# Altium PCB Plate.PcbDoc
Units mm, origin at the board's own origin, x right, y up, seen from the top; angles counter-clockwise.
Board outline 85 x 39.5 mm, 2 copper layers (Top Layer, Bottom Layer), stack 1.569 mm thick; 17 components, 18 nets, 82 pads, 21 vias.
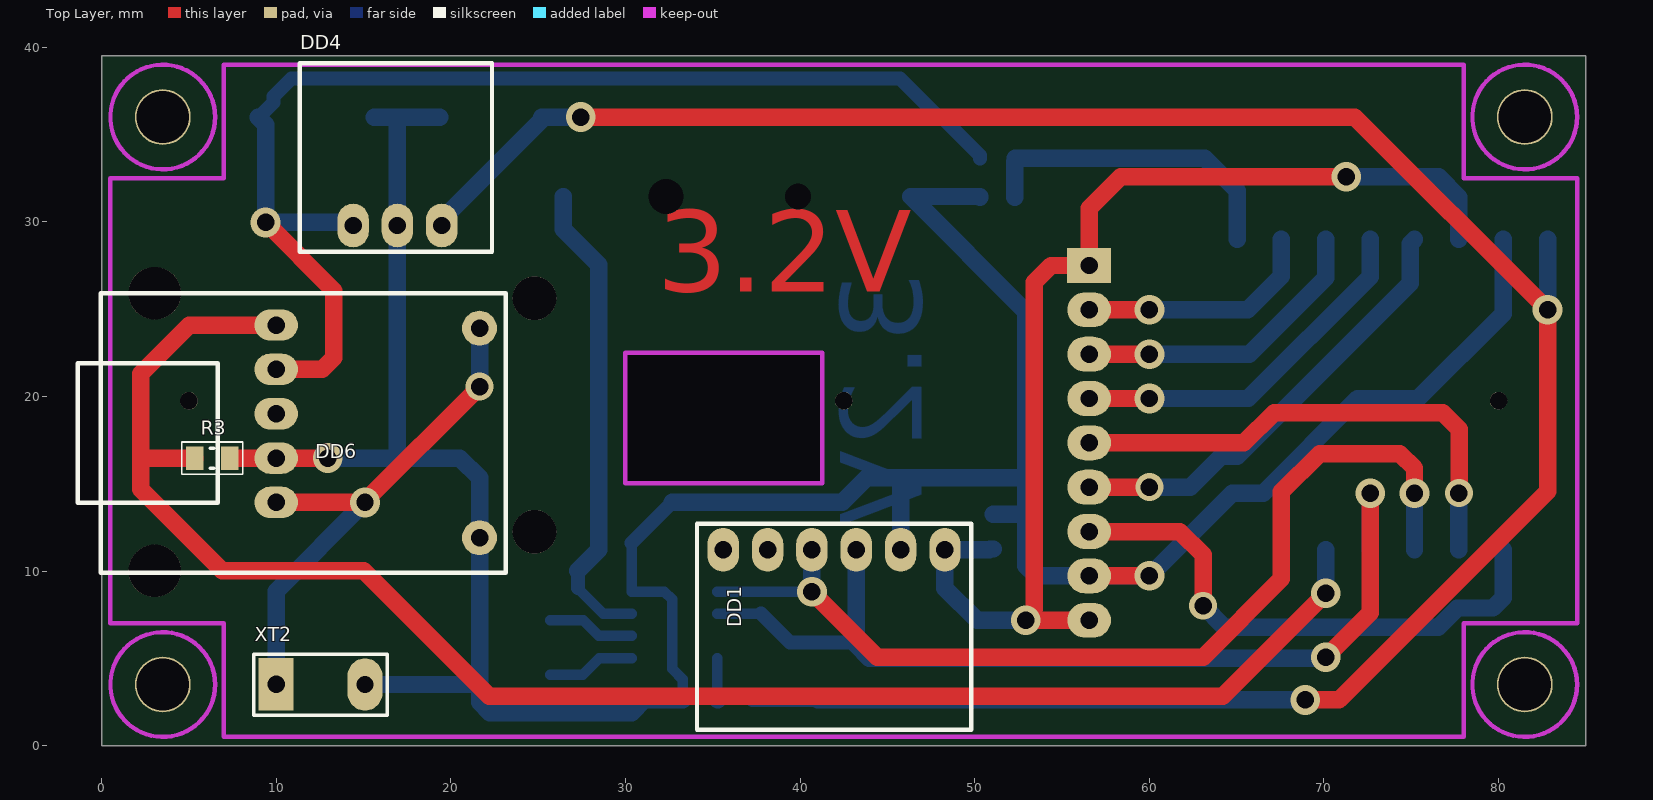
[diagram p0: Top Layer view]
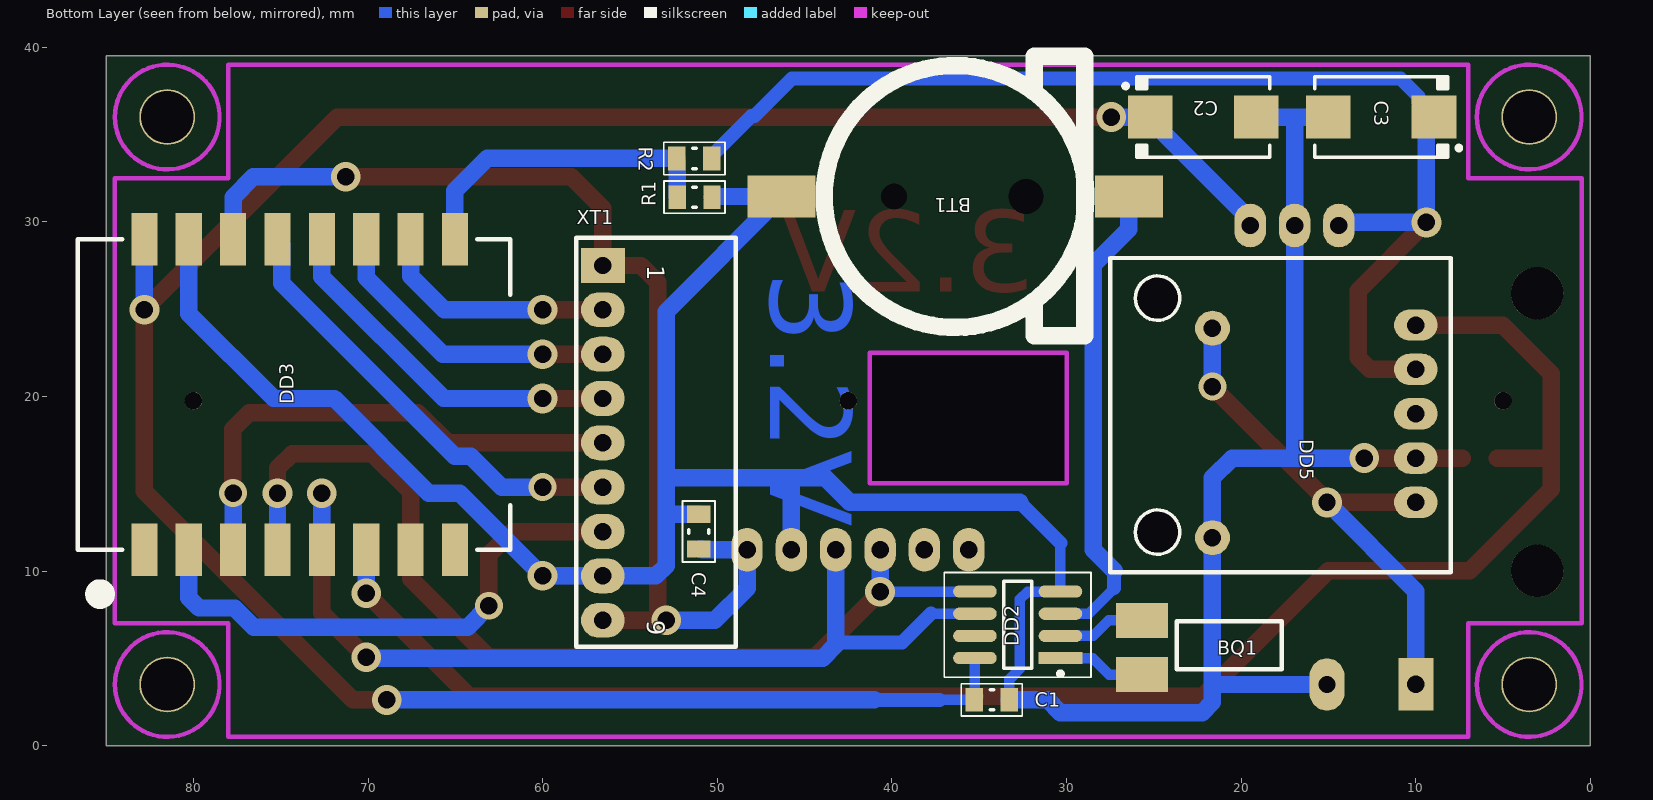
[diagram p1: Bottom Layer view, seen from below]

## Layer stack, top to bottom
Top Solder: solder mask 0.01, Solder Resist, Dk 3.5
Top Layer: signal copper 0.035
Dielectric 1: core 1.4986, Core-043, Dk 4.3
Bottom Layer: signal copper 0.035
Bottom Solder: solder mask 0.01, Solder Resist, Dk 3.5

## Board outline
0,0 0,39.5 85,39.5 85,0
cut-out: 29.995,22.503 41.261,22.503 41.261,15.025 29.995,15.025

## Design rules (kind name [scope] priority, off if disabled: settings)
Clearance [All] p1: gap=0.254 ignorepadtopadclearanceinfootprint=FALSE except(0: Arc-Hole Track-Hole SMDPad-Hole THPad-Hole Via-Hole Fill-Hole Poly-Hole Region-Hole Text-Hole)
PolygonConnect [All] p1: connectstyle=Relief reliefconductorwidth=0.254 reliefentries=4 polygonreliefangle="90 Angle" airgapwidth=0.254
RoutingVias [All] p1: holewidth=0.6 width=1.6 viastyle="Through Hole" minholewidth=0.4 minwidth=0.8 maxholewidth=1 maxwidth=2
SolderMaskExpansion [All] p1: expansion=0.102 istentingtop=FALSE
Width [All] p1: maxlimit=1 minlimit=0.4 preferedwidth=0.6 minimp=50.000000 maximp=50.000000 favimp=50.000000
30 further rules are at their usual default settings.

## Classes and differential pairs
component class Shema: BQ1 BT1 C1 C2 C3 C4 DD2 DD3 DD4 DD5 DD6 R1 R2 R3 XT1 XT2

## Components (designator, comment, footprint, x,y, rotation, side; value= is the part's Value field where it differs from the comment)
BQ1 "32.768k" XTAL_2x6_SMD 25.678,5.619 r180 bottom
BT1 "CR1220" CR1220 36.38,31.45 r180 bottom locked value=3V
C1 "Capacitor" Cap_0805 34.279,2.626 r0 bottom value=100нФ
C2 "Capacitor_Polar" "Tantal 2917_7343" 22.167,36 r180 bottom locked value="47мкФ 25В"
C3 "Capacitor_Polar" "Tantal 2917_7343" 11.978,36 r0 bottom locked value="47мкФ 25В"
C4 "Capacitor" Cap_0805 51.061,12.261 r270 bottom value=100нФ
DD1 "Обозначение при заказе" BME280_6Pin_1 48.296,11.213 r180 top locked
DD2 "DS1307" 8S1_M 29.621,5.014 r0 bottom
DD3 "ESP32-c3-supermini" "ESP32-C3 supermini_SMD" 72.646,20.109 r90 bottom locked value=ESP32-C3-supermini
DD4 "DC-DC_0.9-5V" DC-DC_0.9-5V 14.399,29.788 r0 top locked
DD5 "TPL5110 Module" "TPL5110 Module" 9.989,13.928 r90 bottom locked
DD6 "LiFePO4_Charger" LiFePO4_Charger 21.639,11.907 r90 top locked
R1 "Resistor" Res_0805 51.302,31.414 r180 bottom value=5,1к
R2 "Resistor" Res_0805 51.31,33.626 r0 bottom value=12к
R3 "Resistor" Res_0805 6.332,16.468 r180 top value=10K
XT1 "Header 1X9" PLS-9R-U1 56.551,27.501 r270 bottom locked
XT2 "Header 1x2" PIN_1X2_5.08_DIP 10,3.5 r0 top value=АКБ

## Footprints (in the part's own frame and the unit in brackets; to place one, negate y for a bottom-side part, rotate by r counter-clockwise, add the part's x,y. Pads: shape width x height; smd on the part's side, far side on the other; paste and mask are expansions set on the pad)
8S1_M [mm] "SOIC, 8-Leads, Body 4.9x3.9mm, Pitch 1.27mm, IPC Low Density"
  rect 2.5x0.7 smd: 1(0.725,0)
  oval 2.5x0.7 smd: 2(0.725,-1.27) 3(0.725,-2.54) 4(0.725,-3.81) 5(5.625,-3.81) 6(5.625,-2.54) 7(5.625,-1.27) 8(5.625,0)
  silkscreen extent -1.02,-4.9 7.37,1.09, body extent 0.17,-4.36 6.17,0.54, height 1.63
BME280_6Pin_1 [mm]
  oval 1.8x2.5 hole 1: 1(0,0) 2(2.54,0) 3(5.08,0) 4(7.62,0) 5(10.16,0) 6(12.7,0)
  silkscreen extent -1.5,-1.5 14.2,10.3, body extent -1.32,-1.34 14.02,10.16, height 8.6
Cap_0805 [mm] "Chip Resistor, 2-Leads, Body 2,0x1,3mm, IPC Medium Density"
  rect 1x1.35 smd: 1(-1,0) 2(1,0)
  silkscreen extent -1.75,-0.92 1.75,0.92, body extent -0.98,-0.61 1.02,0.59, height 1.2
CR1220 [mm]
  round 1 hole 1.5 unplated: 0(-3.5,0)
  round 1.3 hole 2 unplated: 0(4.064,0)
  rect 3.9x2.4 smd: 1(9.95,0) 2(-9.95,0)
  silkscreen extent -7.5,-7.98 7.5,8.02, body extent -8.74,-7.49 9.76,7.5, height 3.94
DC-DC_0.9-5V [mm]
  oval 1.8x2.5 hole 1: 1(0,0) 2(2.54,0) 3(5.08,0)
  silkscreen extent -3.05,-1.5 7.95,9.3, body extent -2.9,-1.5 7.85,9.25, height 8.6
"ESP32-C3 supermini_SMD" [mm]
  rect 3x1.5 smd: 1(-8.89,10.16) 2(-8.89,7.62) 3(-8.89,5.08) 4(-8.89,2.54) 5(-8.89,0) 6(-8.89,-2.54) 7(-8.89,-5.08) 8(-8.89,-7.62) 9(8.89,-7.62) 10(8.89,-5.08) 11(8.89,-2.54) 12(8.89,0) 13(8.89,2.54) 14(8.89,5.08) 15(8.89,7.62) 16(8.89,10.16)
  silkscreen extent -11.83,-10.8 8.89,13.97, body extent -8.89,-10.98 8.91,13.02, height 4.2
LiFePO4_Charger [mm]
  round 2 hole 1: 1(0,0) 2(12,0)
  round 3 hole 3: 6(-1.9,18.6) 6(14,18.6)
  silkscreen extent -2,-1.5 14,23, body extent -2,-1.5 14,22.9, height 8.6
PIN_1X2_5.08_DIP [mm]
  rect 2x3 hole 1: 1(-0.011,0.007)
  oval 2x3 hole 1: 2(5.08,0)
  silkscreen extent -1.28,-1.75 6.35,1.75
PLS-9R-U1 [mm]
  rect 2x2.5 hole 1 mask+0.102: 1(0.003,0.004)
  oval 2x2.5 hole 1 mask+0.102: 2(2.54,0) 3(5.08,0) 4(7.62,0) 5(10.16,0) 6(12.7,0) 7(15.24,0) 8(17.78,0) 9(20.32,0)
  silkscreen extent -1.59,-1.52 21.84,7.62, body extent -1.27,-1.27 21.59,7.25, height 6.39
Res_0805 [mm] "Chip Resistor, 2-Leads, Body 2,0x1,3mm, IPC Medium Density"
  rect 1x1.35 smd: 1(-1,0) 2(1,0)
  silkscreen extent -1.75,-0.92 1.75,0.92, body extent -1.15,-0.67 1.15,0.68, height 0.76
"Tantal 2917_7343" [mm] "Molded Capacitor, 2-Leads, Body 7.30x4.30mm, IPC Medium Density"
  rect 2.55x2.45 smd: 1(-3.025,0) 2(3.025,0)
  silkscreen extent -4.58,-2.3 3.8,2.3, body extent -3.65,-2.15 3.65,2.15, height 4.1
"TPL5110 Module" [mm]
  oval 1.8x2.5 hole 1: 1(0,0) 2(2.54,0) 3(5.08,0) 4(7.62,0) 5(10.16,0)
  silkscreen extent -4,-2 14,17.5, body extent -4,-2 14,17, height 8.6
XTAL_2x6_SMD [mm]
  rect 3x2 smd: 1(0,1.55) 2(0,-1.55)
  silkscreen extent 2,-1.25 8,1.5, body extent -1,-1.25 8,1.54, height 1.79

## Part data
BQ1: library part XTAL-0003, "Кварцевый резонатор 32768 Гц (часовой)", Manufacturer=Китай, Package=DIP, Box=A_2, ID=XTAL-0003, Note="Общий запас с XTAL-0001", Status=active, Stock=0
BT1: library part MEC-0001, "Держатель батарейки CR1220", Manufacturer=Китай, ID=MEC-0001, Name="держатель для CR2032", Status=active, Stock=0
C1 C4: "Конденсатор", Package=0805
C2 C3: "Конденсатор эл-лит", Package=DIP
DD1: library part BME280_6Pin, "Описание свойств компонента", Name=BME280
DD2: "Serial Clock", Package=8S1, Name=DS1307
DD3: "esp32-c3-supermini"
DD4 DD5 DD6: "DC-DC Converter", Package=DIP
  DD4: Name=DC-DC
  DD5: Name="TPL5110 Block"
  DD6: Name=LiFePO4_Charger
R1 R2 R3: "Резистор", Package=0805
XT1: Package=PLD2x8, Name="Штыри на плату"
XT2: "Header 1x3", Name=Jamper

## Free pads (board coordinates)
  round 1 hole 1: 47(5,19.75) 47(42.5,19.75) 47(80,19.75)
  round 2.5 hole 2.5: 47(24.787,12.246) 47(24.787,25.622)
  round 3.2 hole 3 unplated: MTH1(3.5,3.5) MTH2(3.5,36) MTH3(81.5,36) MTH4(81.5,3.5)

## Via types
v1: diameter 1.7, hole 1, Top Layer to Bottom Layer, 17 vias
v2: diameter 1.6, hole 1, Top Layer to Bottom Layer, 4 vias

## Nets (pads, with @x,y where several pads share a name; then routed paths per layer and width w, separated by ;. In a path a pad name is that pad's centre, name@x,y a point inside that pad or via, vN(x,y) a via of type N, cw(c..) or ccw(c..) an arc to the next point about the centre after c; other vN are vias at no path point)
+3.3V: C4.2 DD1.1 DD3.14 XT1.1 XT1.9 | length 65.2
  Top Layer w1: XT1.9 v1(52.927,7.181) 52.927,7.37 53.407,7.849 53.407,26.529 54.375,27.498 XT1.1 56.547,30.764 58.359,32.576 v1(71.268,32.576)
  Bottom Layer w1: C4.2 50.886,11.261 50.838,11.213 DD1.1 48.296,9.017 50.133,7.181 v1(52.927,7.181) ; v1(71.268,32.576) 76.564,32.576 77.726,31.414 DD3.14
+5V: C1.2 C2.1 DD2.8 DD3.16 DD4.3 | length 140.2
  Top Layer w1: v1(27.433,36) 71.767,36 v1(82.806,24.961) 82.806,14.569 70.863,2.626 v1@68.912,2.626
  Bottom Layer w0.6: C1.2@35.246,2.834 DD2.8 ; C1.2 37.267,2.626
  Bottom Layer w0.8: 37.267,2.626 40.999,2.626
  Bottom Layer w1: DD4.3 19.479,30.121 C2.1@25.358,36 ; C2.1 C2.1@25.358,36 ; C2.1@25.408,36 C2.1@25.358,36 ; v1(27.433,36) C2.1@25.358,36 ; C1.2@35.246,2.834 35.279,2.801 C1.2 ; 40.999,2.626 68.912,2.626 v1(68.922,2.616) ; v1(82.806,24.961) DD3.16
ADC_BT: DD3.9 R1.1 R2.2 | length 18.5
  Bottom Layer w1: R1.1 52.302,33.444 52.31,33.451 R2.2 63.171,33.626 65.026,31.772 DD3.9
EPD_BUSY: DD3.10 XT1.2 | length 13.9
  Top Layer w1: XT1.2 v1(60.007,24.961)
  Bottom Layer w1: v1(60.007,24.961) 65.64,24.961 67.566,26.886 DD3.10
EPD_CS: DD3.3 XT1.5 | length 29.2
  Top Layer w1: XT1.5 65.416,17.341 67.147,19.072 76.808,19.072 77.758,18.122 77.758,14.49 v2(77.726,14.458)
  Bottom Layer w1: DD3.3 v2(77.726,14.458)
EPD_DC: DD3.12 XT1.4 | length 21.1
  Top Layer w1: XT1.4 v1(60.007,19.881)
  Bottom Layer w1: v1(60.007,19.881) 65.663,19.881 72.646,26.863 DD3.12
EPD_MOSI: DD3.2 XT1.7 | length 31.1
  Top Layer w1: XT1.7 61.742,12.261 63.077,10.925 v2(63.077,8.013)
  Bottom Layer w1: v2(63.077,8.013) 64.298,6.792 76.546,6.792 77.635,7.881 79.68,7.881 80.266,8.467 DD3.2
EPD_RST: DD3.11 XT1.3 | length 17.6
  Top Layer w1: XT1.3 v1(60.007,22.421)
  Bottom Layer w1: v1(60.007,22.421) 65.722,22.421 70.106,26.805 DD3.11
EPD_SCK: DD3.13 XT1.6 | length 25.8
  Top Layer w1: XT1.6 v2(60.007,14.801)
  Bottom Layer w1: v2(60.007,14.801) 62.332,14.801 64.114,16.582 65.026,16.582 74.936,26.492 74.936,28.749 DD3.13
GND: BT1.2 C1.1 C2.2 C3.2 C4.1 DD1.2 DD2.4 DD3.15 DD4.2 DD5.2 DD6.1 R1.2 R3.1 XT1.8 XT2.2 | length 180.6
  Top Layer w1: R3.1 DD5.2 v1(12.939,16.468) ; XT1.8 v1(60.007,9.721)
  Bottom Layer w0.6: 30.346,11.603 DD2.4 32.23,8.824 32.67,8.384 32.67,4.396 33.279,3.788 C1.1
  Bottom Layer w0.8: 30.346,11.603 32.67,13.928
  Bottom Layer w1: v1(12.939,16.468) 16.977,16.468 ; XT2.2 21.639,3.5 ; C3.2@15.609,36 16.939,36 ; DD4.2@16.977,29.75 DD4.2 ; C2.2@19.358,36 C2.2 16.939,36 ; 32.67,13.928 42.412,13.928 43.814,15.33 45.756,15.33 ; C1.1 31.077,2.626 30.346,1.895 22.225,1.895 21.639,2.481 21.639,3.5 ; DD1.2 45.756,15.33 ; R1.2 50.302,31.45 BT1.2 52.927,24.852 52.927,15.33 ; C4.1 52.846,13.261 52.927,13.18 ; v1@60.007,9.705 64.76,14.458 66.511,14.458 71.934,19.881 75.411,19.881 80.266,24.735 DD3.15 ; v1(60.007,9.721) XT1.8 53.513,9.721 52.927,10.307 52.927,13.18 ; DD4.2 16.939,16.506 16.977,16.468 ; DD4.2 16.939,36 ; 16.977,16.468 20.502,16.468 21.639,15.33 DD6.1 21.639,3.5 ; 45.756,15.33 52.927,15.33 ; 52.927,13.18 52.927,15.33
I2C_SCL: DD1.3 DD2.6 DD3.5 | length 54.9
  Top Layer w1: v1(70.106,5.06) 72.646,7.6 v1(72.646,14.458)
  Bottom Layer w0.6: DD2.6 37.762,7.554
  Bottom Layer w0.8: 37.762,7.554 39.408,5.909 43.216,5.909
  Bottom Layer w1: 43.216,7.181 43.216,5.909 43.216,5.767 43.969,5.014 70.06,5.014 v1(70.106,5.06) ; 43.216,7.333 DD1.3 ; DD3.5 v1(72.646,14.458)
I2C_SDA: DD1.4 DD2.5 DD3.4 | length 56.7
  Top Layer w1: v1(40.676,8.813) 44.429,5.06 63.077,5.06 67.566,9.548 67.566,14.533 69.746,16.713 74.352,16.713 75.186,15.88 v1(75.186,14.458)
  Bottom Layer w0.6: DD2.5 35.251,8.819 40.67,8.819 v1(40.676,8.813)
  Bottom Layer w1: v1(40.676,8.813) DD1.4 ; DD3.4 v1(75.186,14.458)
NetBQ1_1: BQ1.1 DD2.2 | length 5
  Bottom Layer w0.6: BQ1.1 25.69,7.181 27.581,7.181 28.477,6.284 DD2.2
NetBQ1_2: BQ1.2 DD2.1 | length 5.1
  Bottom Layer w0.6: BQ1.2 27.557,4.069 28.502,5.014 DD2.1
NetBT1_1: BT1.1 DD2.3 | length 27.5
  Bottom Layer w0.6: 27.271,9.017 28.734,7.554 DD2.3
  Bottom Layer w0.8: 27.271,9.017 27.271,10.007
  Bottom Layer w1: BT1.1 26.43,29.585 28.477,27.538 28.477,11.213 27.271,10.007
NetC3_1: C3.1 DD4.1 DD5.4 R2.1 | length 68.7
  Top Layer w1: v1(9.384,29.963) 13.296,26.05 13.296,22.203 12.641,21.548 DD5.4
  Bottom Layer w0.8: C3.1 9.003,36 9.828,36.825 9.828,37.175 10.872,38.219 45.717,38.219 47.876,36.06 48.051,36.06 50.31,33.801 R2.1
  Bottom Layer w1: C3.1 9.384,35.569 v1(9.384,29.963) 14.224,29.963 DD4.1
NetDD5_1: DD5.1 DD6.2 XT2.1 | length 30.3
  Top Layer w1: DD5.1 15.007,13.928 v2(21.639,20.56)
  Bottom Layer w1: XT2.1 9.989,8.837 v1(15.08,13.928) ; v2(21.639,20.56) DD6.2
PWR_OFF: DD3.6 DD5.5 R3.2 | length 96.4
  Top Layer w1: R3.2 2.225,16.468 ; DD5.5 5.003,24.088 2.225,21.31 2.225,16.468 ; v1(70.106,8.736) 64.199,2.829 22.2,2.829 15.022,10.007 6.911,10.007 2.225,14.692 2.225,16.468
  Bottom Layer w1: v1(70.106,8.736) DD3.6
pads on no net: BT1.0 DD1.5 DD1.6 DD2.7 DD3.1 DD3.7 DD3.8 DD5.3 DD6.6

## Keep-outs
Keep-Out Layer:
  circle w0.25: c3.5,36 r3
  circle w0.25: c81.5,36 r3
  circle w0.25: c81.5,3.5 r3
  circle w0.25: c3.5,3.5 r3
  lines w0.254: 0.5,7 0.5,32.5 7,32.5 7,39 78,39 78,32.5 84.5,32.5 84.5,7 78,7 78,0.5 6.993,0.5 6.993,7 0.5,7 ; 29.995,15.025 41.261,15.025 41.261,22.503 29.995,22.503 29.995,15.025

## Other copper
Top Layer:
  text "3.2V" at 31.786,24.445 h8
Bottom Layer:
  text "3.2V" at 48.511,27.149 h8 r90

## Silkscreen, mask and mechanical layers (free items; w line width, h text height)
Board Outline:
  the board outline again, w0.5

## Dimensions
81.5,36 to 88.818,42.568 on Board Dimensions
85,39.5 to 85,0 on Board Dimensions
0,39.5 to 85,39.5 on Board Dimensions

## Text inside footprints (layer, text, board x,y; h text height)
XT1: Bottom Overlay "1" at 54.011,27.501 h1 r90; Bottom Overlay "9" at 54.011,7.181 h1 r90